# Altium PCB WIoT_AM01_V100.PcbDoc
Units mil, origin at the board's own origin, x right, y up, seen from the top; angles counter-clockwise.
Board outline 1422.35 x 1973.53 mil, 4 copper layers (Top Layer, Internal Plane 1, Internal Plane 2, Bottom Layer); 32 components, 39 nets, 189 pads, 130 vias.
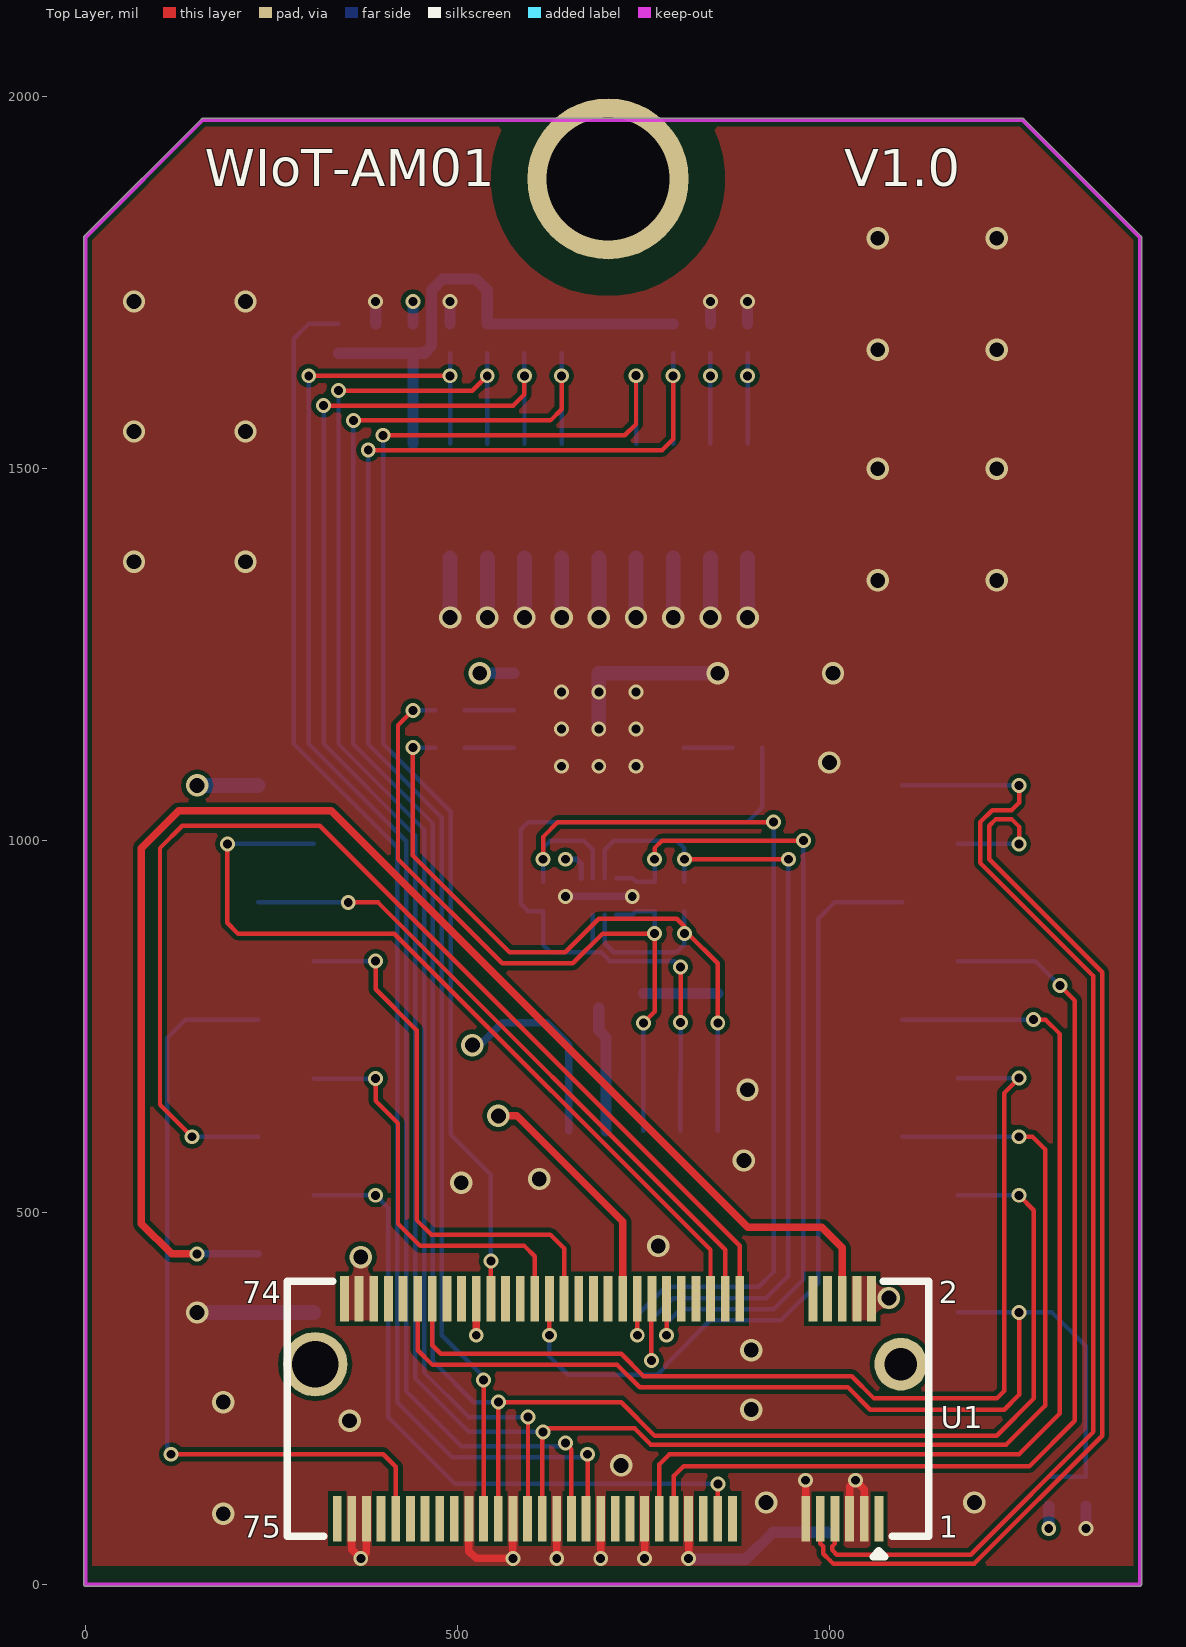
[diagram p0: Top Layer view]
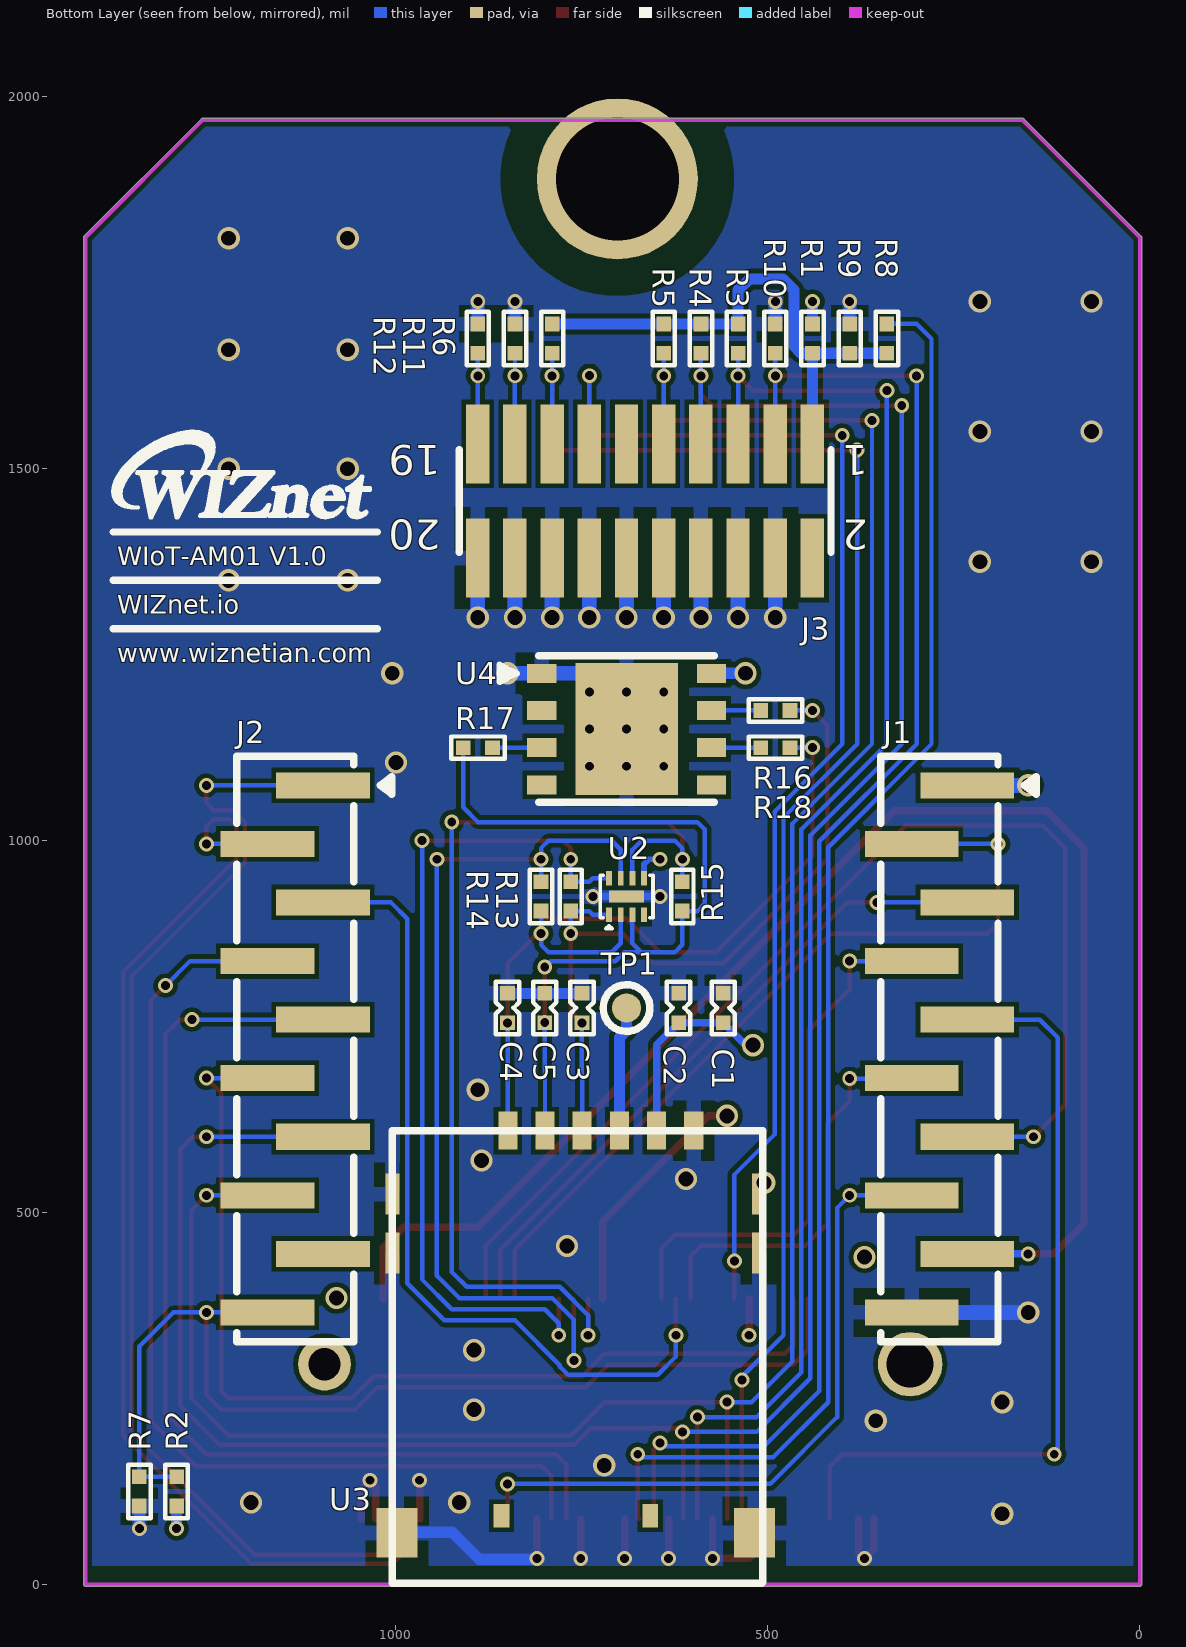
[diagram p1: Bottom Layer view, seen from below]
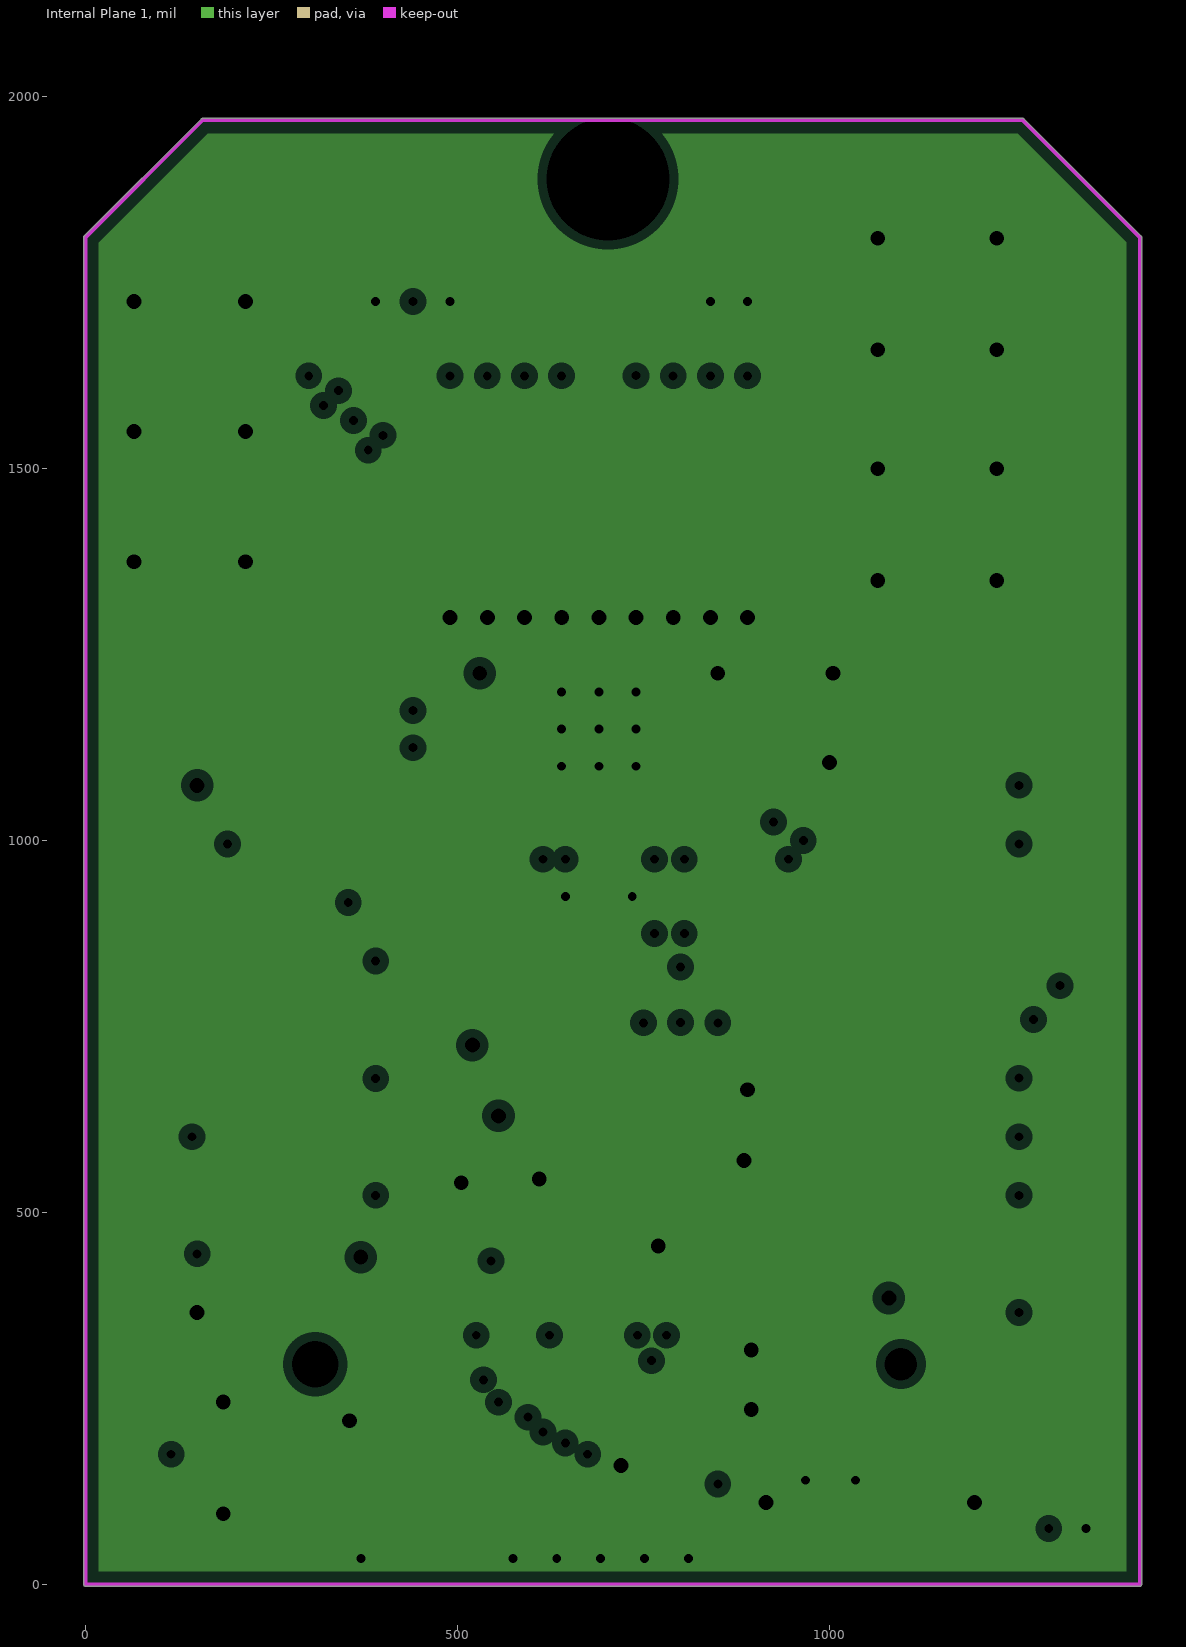
[diagram p2: Internal Plane 1, clearances drawn from the general rule]
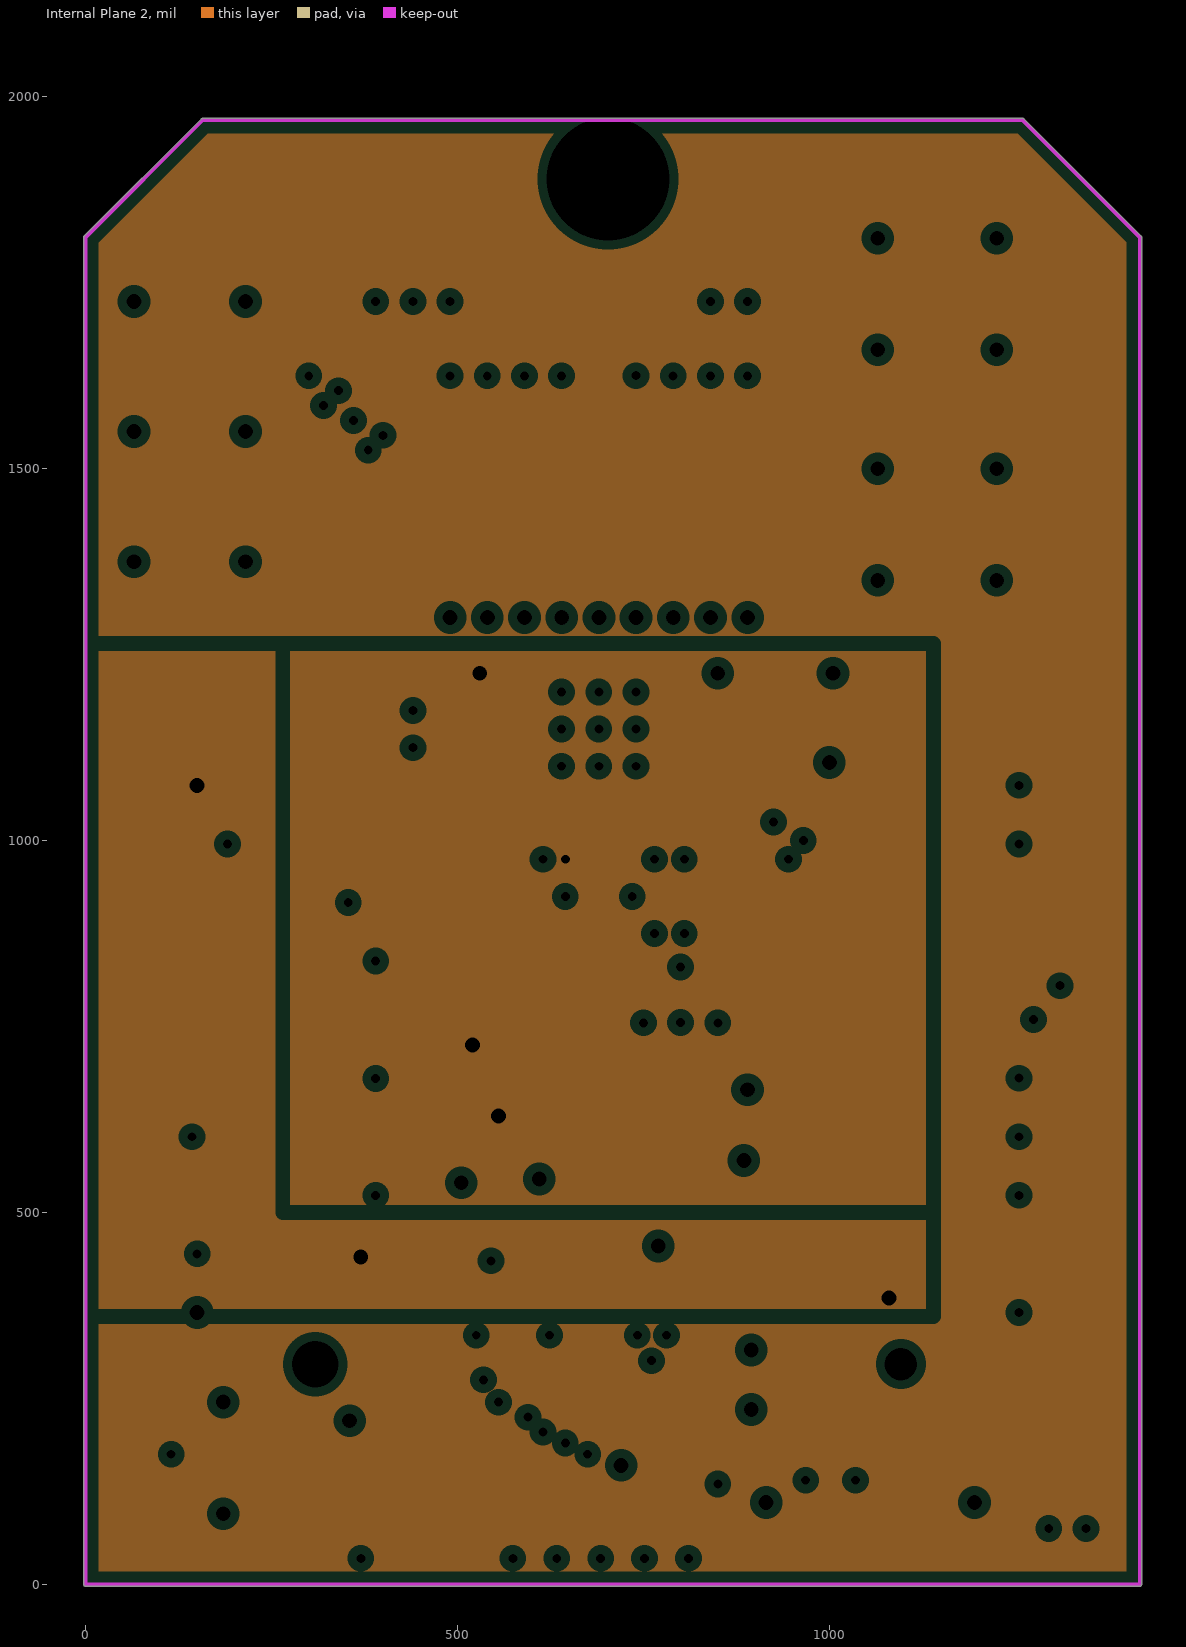
[diagram p3: Internal Plane 2, clearances drawn from the general rule]

## Layer stack, top to bottom
Top Solder: solder mask 0.4, Solder Resist, Dk 3.5
Top Layer: signal copper 1.4
Dielectric1: core 12.6, FR-4, Dk 4.8
Internal Plane 1: plane copper 1.4, net GND
Dielectric5: prepreg 12.6, FR-4, Dk 4.8
Internal Plane 2: plane copper 1.4, net (Multiple Nets)
Dielectric6: core 12.6, FR-4, Dk 4.8
Bottom Layer: signal copper 1.4
Bottom Solder: solder mask 0.4, Solder Resist, Dk 3.5

## Board outline
-2.51,0 -2.51,1811.02 cw(c0,1811.02) -1.78,1812.8 155.7,1970.28 cw(c157.48,1968.5) 157.48,1971.02 1259.84,1971.02 cw(c1259.84,1968.5) 1261.62,1970.28 1419.1,1812.8 cw(c1417.32,1811.02) 1419.84,1811.02 1419.84,0 cw(c1417.32,0) 1417.32,-2.51 0,-2.51 cw(c0,0)

## Design rules (kind name [scope] priority, off if disabled: settings)
Clearance [All] p1: gap=6
DiffPairsRouting [All] p1: maxlimit=6 minlimit=6 mostfreqgap=6 toplayer_minwidth=6 toplayer_maxwidth=6 toplayer_prefwidth=6 bottomlayer_minwidth=6 bottomlayer_maxwidth=6 bottomlayer_prefwidth=6 maxuncoupledlength=600
HoleSize [All] p1: absolutevalues=TRUE maxlimit=1000 minlimit=1 maxpercent=80.000 minpercent=20.000
PlaneClearance [All] p1: clearance=12
PlaneConnect [All] p1: planeconnectstyle=Direct reliefexpansion=20 reliefentries=4 reliefconductorwidth=10 reliefairgap=10
PolygonConnect PolygonConnect_2 [IsPad vs IsNamedPolygon('Bottom Layer-GND') Or  IsNamedPolygon('Bottom Layer-GND')] p1: connectstyle=Relief reliefconductorwidth=20 reliefentries=4 polygonreliefangle="90 Angle" airgapwidth=15
PolygonConnect PolygonConnect_1 [IsVia] p2: connectstyle=Direct reliefconductorwidth=10 reliefentries=4 polygonreliefangle="90 Angle" airgapwidth=10
PolygonConnect [All] p3: connectstyle=Direct reliefconductorwidth=10 reliefentries=4 polygonreliefangle="90 Angle" airgapwidth=10
RoutingVias [All] p1: holewidth=12 width=20 viastyle="Through Hole" minholewidth=12 minwidth=20 maxholewidth=20 maxwidth=30
SolderMaskExpansion [All] p1: expansion=0
Width [All] p1: maxlimit=100 minlimit=4 preferedwidth=6
26 further rules are at their usual default settings.

## Components (designator, comment, footprint, x,y, rotation, side; value= is the part's Value field where it differs from the comment)
C1 "1uF" CAP-0402 560,775 r270 bottom
C2 "33pF" CAP-0402 620,775 r270 bottom
C3 "33pF" CAP-0402 750,775 r270 bottom
C4 "33pF" CAP-0402 850,775 r270 bottom
C5 "33pF" CAP-0402 800,775 r270 bottom
J1 "2.00mm 1x10 Pin Header SMD" IDC(SMD)-1X10(2MM) 269.33,720 r180 bottom locked
J2 "2.00mm 1x10 Pin Header SMD" IDC(SMD)-1X10(2MM) 1135.47,720 r180 bottom locked
J3 "1.27mm 2x10 Pin Header SMD" IDC(SMD)-2X10(1.27MM) 665.12,1456.69 r0 bottom locked
R1 "DNI" RES-0402 440,1675 r270 bottom
R2 "10K" RES-0402 1295,125 r270 bottom
R3 "10K" RES-0402 540,1675 r90 bottom
R4 "10K" RES-0402 590,1675 r90 bottom
R5 "10K" RES-0402 640,1675 r90 bottom
R6 "10K" RES-0402 790,1675 r90 bottom
R7 "DNI" RES-0402 1345,125 r90 bottom
R8 "10K" RES-0402 340,1675 r90 bottom
R9 "DNI" RES-0402 390,1675 r270 bottom
R10 "47K" RES-0402 490,1675 r270 bottom
R11 "10K" RES-0402 840,1675 r270 bottom
R12 "10K" RES-0402 890,1675 r270 bottom
R13 "DNI" RES-0402 765,925 r270 bottom
R14 "DNI" RES-0402 805,925 r270 bottom
R15 "DNI" RES-0402 615,925 r270 bottom
R16 "0R" RES-0402 490,1175 r180 bottom
R17 "0R" RES-0402 890,1125 r180 bottom
R18 "0R" RES-0402 490,1125 r180 bottom
TP1 "TESTPOINT_SMD" TP(SMD)-1PI 690,775 r180 bottom
U1 "PCIe_M2" PCIE_M2 702.4,236.22 r0 top locked
U2 "TPD3F303DQDR" PWSON08(0.4/1.45X1.8) 690,925 r90 bottom
U3 "Micro SIM" 0786463001 1005,610 r270 bottom
U4 "e-SIM" SON08(1.27/6X5) 690,1150 r180 bottom locked
? "Comment" LOGO-WIZNET(SMALL) 1330.43,1434.57 r180 bottom

## Footprints (in the part's own frame and the unit in brackets; to place one, negate y for a bottom-side part, rotate by r counter-clockwise, add the part's x,y. Pads: shape width x height; smd on the part's side, far side on the other; paste and mask are expansions set on the pad)
0786463001 [mm]
  rect 1.3x0.65 smd: C1(0,9.025) C2(0,6.485) C3(0,3.945) C5(0,10.295) C6(0,7.755) C7(0,5.215)
  rect 1.4x0.48 smd: GND1(2.17,12.53) GND2(4.17,12.53) GND5(4.17,0) GND6(2.17,0)
  rect 1.7x1.4 smd: GND3(13.73,12.37) GND4(13.73,0.16)
  rect 0.8x0.54 smd: X1(13.15,8.81) X2(13.15,3.73)
  silkscreen extent 0,0 15.45,12.65
CAP-0402 [mm]
  rect 0.5x0.5 smd: 1(-0.5,0) 2(0.5,0)
  silkscreen extent -0.9,-0.4 0.9,0.4, body extent -0.48,-0.25 0.52,0.25, height 0.6
IDC(SMD)-1X10(2MM) [mm]
  rect 3.2x0.89 smd: 1(0.95,9) 2(-0.95,7) 3(0.95,5) 4(-0.95,3) 5(0.95,1) 6(-0.95,-1) 7(0.95,-3) 8(-0.95,-5) 9(0.95,-7) 10(-0.95,-9)
  silkscreen extent -2,-10 3.3,10, body extent -2.25,-9.98 2.25,9.97, height 6.5
IDC(SMD)-2X10(1.27MM) [mm]
  rect 0.8x2.7 smd: 1(-5.715,-1.95) 2(-5.715,1.95) 3(-4.445,-1.95) 4(-4.445,1.95) 5(-3.175,-1.95) 6(-3.175,1.95) 7(-1.905,-1.95) 8(-1.905,1.95) 9(-0.635,-1.95) 10(-0.635,1.95) 11(0.635,-1.95) 12(0.635,1.95) 13(1.905,-1.95) 14(1.905,1.95) 15(3.175,-1.95) 16(3.175,1.95) 17(4.445,-1.95) 18(4.445,1.95) 19(5.715,-1.95) 20(5.715,1.95)
  silkscreen extent -6.35,-1.75 6.35,1.75, body extent -6.35,-2.75 6.35,2.75, height 4.5
LOGO-WIZNET(SMALL) [mil]
  silkscreen extent -50,0 296,115
PCIE_M2 [mm]
  round 2.2 hole 1.6: 0(-10,1.52)
  round 5.5 hole 4.2: 0(0,42)
  round 1.8 hole 1.1: 0(10,1.52)
  rect 0.3x1.55 smd: 1(9.25,-3.755) 2(9,3.755) 3(8.75,-3.755) 4(8.5,3.755) 5(8.25,-3.755) 6(8,3.755) 7(7.75,-3.755) 8(7.5,3.755) 9(7.25,-3.755) 10(7,3.755) 11(6.75,-3.755) 20(4.5,3.755) 21(4.25,-3.755) 22(4,3.755) 23(3.75,-3.755) 24(3.5,3.755) 25(3.25,-3.755) 26(3,3.755) 27(2.75,-3.755) 28(2.5,3.755) 29(2.25,-3.755) 30(2,3.755) 31(1.75,-3.755) 32(1.5,3.755) 33(1.25,-3.755) 34(1,3.755) 35(0.75,-3.755) 36(0.5,3.755) 37(0.25,-3.755) 38(0,3.755) 39(-0.25,-3.755) 40(-0.5,3.755) 41(-0.75,-3.755) 42(-1,3.755) 43(-1.25,-3.755) 44(-1.5,3.755) 45(-1.75,-3.755) 46(-2,3.755) 47(-2.25,-3.755) 48(-2.5,3.755) 49(-2.75,-3.755) 50(-3,3.755) 51(-3.25,-3.755) 52(-3.5,3.755) 53(-3.75,-3.755) 54(-4,3.755) 55(-4.25,-3.755) 56(-4.5,3.755) 57(-4.75,-3.755) 58(-5,3.755) 59(-5.25,-3.755) 60(-5.5,3.755) 61(-5.75,-3.755) 62(-6,3.755) 63(-6.25,-3.755) 64(-6.5,3.755) 65(-6.75,-3.755) 66(-7,3.755) 67(-7.25,-3.755) 68(-7.5,3.755) 69(-7.75,-3.755) 70(-8,3.755) 71(-8.25,-3.755) 72(-8.5,3.755) 73(-8.75,-3.755) 74(-9,3.755) 75(-9.25,-3.755)
  silkscreen extent -10.95,-5.06 10.95,4.35
PWSON08(0.4/1.45X1.8) [mm]
  rect 0.5x0.2 smd: 1(-0.625,0.6) 2(-0.625,0.2) 3(-0.625,-0.2) 4(-0.625,-0.6) 5(0.625,-0.6) 6(0.625,-0.2) 7(0.625,0.2) 8(0.625,0.6)
  rect 0.4x1.2 smd: 9(0,0)
  silkscreen extent -1.1,-0.9 0.72,0.9, body extent -0.66,-0.85 0.66,0.85, height 0.8
RES-0402 [mm]
  rect 0.5x0.5 smd: 1(-0.5,0) 2(0.5,0)
  silkscreen extent -0.91,-0.38 0.91,0.38, body extent -0.5,-0.25 0.5,0.25, height 0.35
SON08(1.27/6X5) [mm]
  rect 1x0.65 smd: 1(-2.9,1.905) 2(-2.9,0.635) 3(-2.9,-0.635) 4(-2.9,-1.905) 5(2.9,-1.905) 6(2.9,-0.635) 7(2.9,0.635) 8(2.9,1.905)
  rect 3.5x4.5 smd: 9(0,0)
  silkscreen extent -4.33,-2.5 3,2.5, body extent -3,-2.5 3,2.5, height 1
TP(SMD)-1PI [mm]
  round 1 smd: 1(0,0)
  silkscreen extent -0.8,-0.8 0.8,0.8

## Part data
C1 C2 C3 C4 C5: library part CAP-0402, "Ceramic CAP 0402(1005)"
R1 R2 R3 R4 R5 R6 R7 R8 R9 R10 R11 R12 R13 R14 R15 R16 R17 R18: library part RES-0402, "RES-0402"
TP1: "TEST POINT"
U1: library part PCIe-M2
U2: "ESD Protection SIM"
U3: "Micro SIM SMT 1.45mm Push/Pull"

## Via types
v1: diameter 20, hole 12, Top Layer to Bottom Layer, tented both sides, 80 vias
v2: diameter 30, hole 20, Top Layer to Bottom Layer, tented both sides, 46 vias
v3: diameter 20, hole 12, Top Layer to Bottom Layer, 4 vias

## Nets (pads, with @x,y where several pads share a name; then routed paths per layer and width w, separated by ;. In a path a pad name is that pad's centre, name@x,y a point inside that pad or via, vN(x,y) a via of type N, cw(c..) or ccw(c..) an arc to the next point about the centre after c; other vN are vias at no path point)
1.8V_OUT: R1.1 R2.2 U1.56 | length 109.7
  Top Layer w10: v1(525.24,335) U1.56
  Bottom Layer w15: R1.1 v1(440,1725) ; v1(1295,75) R2.2
GND: C1.1 C2.1 C3.1 C4.1 C5.1 J1.10 J3.4 J3.6 J3.8 J3.10 J3.12 J3.14 J3.16 J3.18 J3.20 R7.1 R9.1 R10.1 R11.1 R12.1 U1.3 U1.5 U1.11 U1.27 U1.33 U1.39 U1.45 U1.51 U1.57 U1.71 U1.73 U2.9 U3.C5 U3.GND1 U3.GND2 U3.GND3 U3.GND4 U3.GND5 U3.GND6 U4.1 U4.9 | length 2309.6
  Top Layer w10: U1.73 357.91,47.09 v1(370,35) 377.6,42.6 U1.71 ; U1.57 515.39,44.61 525,35 v1(574.45,35) U1.51 ; v1(633.5,35) U1.45 ; v1(692.56,35) U1.39 ; v1(751.61,35) U1.33 ; v1(810.67,35) U1.27 ; U1.11 v1(968.15,140) ; U1.5 1027.2,132.2 v1(1035,140) 1046.89,128.11 U1.3
  Bottom Layer w10: v1(645,925) U2.9 v1(735,925)
  Bottom Layer w15: R9.1 v1(390,1725) ; R10.1 v1(490,1725) ; v1@573.31,33.86 v1(574.45,35) ; C3.1 C5.1 C4.1 ; v1(810.67,35) 811.81,33.86 888.11,33.86 924.25,70 998.15,70 U3.GND4 ; R11.1 v1(840,1725) ; R12.1 v1(890,1725) ; v1(1345,75) R7.1
  Bottom Layer w20: v2(150,365.67) J1.10 ; v2(490.12,1300) J3.4 ; v2(540.12,1300) J3.6 ; v2(590.12,1300) J3.8 ; v2(640.12,1300) J3.10 ; v1(690,1150) v1(690,1200) 690,1225 U4.1 v2(850,1225) ; v2(690.12,1300) J3.12 ; v2(740.12,1300) J3.14 ; v2(790.12,1300) J3.16 ; v2(840.12,1300) J3.18 ; v2(890.12,1300) J3.20
  other v1: 640,1100 690,1100 740,1100 640,1150 740,1150 640,1200 740,1200
  other v2: 185,95 915,110 1195,110 720,160 355,220 895,235 185,245 895,315 770,455 505,540 610,545 885,570 890,665 1000,1105 1005,1225 1065,1350 1225,1350 65,1375 215,1375 1065,1500 1225,1500 65,1550 215,1550 1065,1660 1225,1660 65,1725 215,1725 1065,1810 1225,1810
GPIO1: J1.8 U1.23 | length 915.4
  Top Layer w6: U1.23 v1(850.04,135)
  Bottom Layer w6: J1.8 v1(390,523.15) 407,506.15 407,225 497,135 v1(850.04,135)
JTAG_PS_HOLD: R8.2 U1.41 | length 1931.5
  Top Layer w6: U1.41 675,90.51 v1(675,175)
  Bottom Layer w6: R8.2 299.68,1694.68 280,1675 280,1130 419,991 419,245 493,171 671,171 v1(675,175)
JTAG_SRST: J3.15 R6.1 U1.55 | length 2124
  Top Layer w6: v1(380,1525) 775,1525 790,1540 v1(790,1625) ; v1(535,275) 535.08,274.92 U1.55
  Bottom Layer w6: v1(380,1525) 380,1130 479,1031 479,335 535,279 v1(535,275) ; R6.1 v1(790,1625) 790.12,1624.88 J3.15
JTAG_TCK: J2.8 J3.9 R5.1 U1.53 | length 3152.8
  Top Layer w6: v1(360,1565) 625,1565 640,1580 v1(640,1625) ; U1.53 554.76,244.76 v1(555,245) 720,245 765,200 1225,200 1275,250 1275,503.15 v1(1255,523.15)
  Bottom Layer w6: v1(360,1565) 360,1130 467,1023 467,300 522,245 v1(555,245) ; R5.1 v1(640,1625) 640.12,1624.88 J3.9 ; J2.8 v1(1255,523.15)
JTAG_TDI: J3.5 R3.1 U1.49 | length 1999.3
  Top Layer w6: v1(340,1605) 520,1605 v1(540,1625) ; U1.49 594.82,89.07 v1(594.82,224.82)
  Bottom Layer w6: v1(340,1605) 340,1130 455,1015 455,285 515,225 594.64,225 v1(594.82,224.82) ; R3.1 v1(540,1625) 540,1533.58 J3.5
JTAG_TDO: J3.13 U1.54 | length 1724
  Top Layer w6: v1(400,1545) 725,1545 740,1560 v1(740,1625.12) ; U1.54 v1(544.92,435)
  Bottom Layer w6: v1(400,1545) 400,1130 491,1039 491,605 544.92,551.08 v1(544.92,435) ; J3.13 v1@740.12,1625.12
JTAG_TMS: J2.7 J3.7 R4.1 U1.47 | length 3351.3
  Top Layer w6: v1(320,1585) 575,1585 590,1600 v1(590,1625) ; U1.47 613.82,201.62 622.2,210 738.03,210 760.03,188 1238,188 1290,240 1290,585 1273.11,601.89 v1(1255,601.89)
  Bottom Layer w6: v1(320,1585) 320,1130 443,1007 443,277 515,205 v1(615,205) ; R4.1 v1(590,1625) 590.12,1624.88 J3.7 ; J2.7 v1(1255,601.89)
JTAG_TRST: J3.3 R10.2 U1.43 | length 2082.5
  Top Layer w6: v1(300,1625) v1(490,1625) ; v1(645,190) 653.19,181.81 U1.43
  Bottom Layer w6: v1(300,1625) 300,1130 431,999 431,260 505,186 641,186 v1(645,190) ; R10.2 v1(490,1625) 490,1533.58 J3.3
NetJ3_1: J3.1 R1.2 R3.2 R4.2 R5.2 R6.2 R8.1 R9.2 | length 708.7
  Bottom Layer w15: R8.1 R9.2 R1.2 ; J3.1 440.12,1655.2 R1.2 ; R6.2 R5.2 R4.2 R3.2 540,1740 525,1755 480,1755 465,1740 465,1665 455.32,1655.32 R1.2
NetJ3_17: J3.17 R11.2 | length 121.9
  Bottom Layer w6: R11.2 v1(840,1625) 840.12,1624.88 J3.17
NetJ3_19: J3.19 R12.2 | length 121.9
  Bottom Layer w6: R12.2 v1(890,1625) 890.12,1624.88 J3.19
NetR13_1: R13.1 U1.30 U2.8 | length 1166.3
  Top Layer w6: v1(765,975) 765,990 775,1000 v1(965,1000) ; v1(781.14,335) U1.30
  Bottom Layer w6: U2.8 735.39,949.61 740.32,944.68 R13.1 v1(765,975) ; v1(781.14,335) 781.14,351.14 800,370 925,370 965,410 v1(965,1000)
NetR14_1: R14.1 U1.32 U2.7 | length 1247.2
  Top Layer w6: v1(760.77,300.77) 760.77,383.37 U1.32 ; v1(805,975) v1(945,975)
  Bottom Layer w6: U2.7 697.87,987.87 710,1000 795,1000 805,990 v1(805,975) R14.1 ; v1(760.77,300.77) 760.77,355.77 790,385 915,385 945,415 v1(945,975)
NetR15_1: R15.1 U1.34 U2.6 | length 1396.3
  Top Layer w6: v1(615,975) 615,1005 635,1025 v1(925,1025) ; v1(741.77,335) U1.34
  Bottom Layer w6: R15.1 v1(615,975) 615,990 625,1000 670,1000 682.13,987.87 U2.6 ; v1(741.77,335) 741.77,361.77 780,400 905,400 925,420 v1(925,1025)
NetR16_1: R16.1 U4.7 | length 66.1
  Bottom Layer w6: R16.1 U4.7
NetR17_2: R17.2 U4.3 | length 66.1
  Bottom Layer w6: U4.3 R17.2
NetR18_1: R18.1 U4.6 | length 66.1
  Bottom Layer w6: R18.1 U4.6
NetTP1_1: TP1.1 U3.C6 | length 169
  Bottom Layer w15: TP1.1 690,745 699.68,735.32 U3.C6
POWER: J1.9 U1.6 | length 1953.7
  Top Layer w10: v1(150,444.41) 115.59,444.41 75,485 75,990 125,1040 330,1040 890,480 990,480 1017.36,452.64 U1.6
  Bottom Layer w10: v1(150,444.41) J1.9
READY: J1.4 U1.44 | length 736
  Top Layer w6: v1(390,838.11) 390,800 445,745 445,490 465,470 625,470 643.35,451.65 U1.44
  Bottom Layer w6: J1.4 v1(390,838.11)
RESET: J1.5 U1.67 | length 1072.7
  Top Layer w6: v1(115,175) 400,175 416.97,158.03 U1.67
  Bottom Layer w6: v1(115,175) 110,180 110,735 134.37,759.37 J1.5
SIMCLK: C4.2 R14.2 R18.2 U2.2 U3.C3 | length 1113.5
  Top Layer w6: v1(440,1125) 440,980 570,850 645,850 690,895 795,895 805,885 v1(805,875) 810,875 850,835 v1(850,755)
  Bottom Layer w6: v1(440,1125) R18.2 ; U2.2 697.87,862.13 710,850 795,850 805,860 v1(805,875) R14.2 ; U3.C3 849.69,685 850,685.31 v1(850,755)
SIMIO: C5.2 R15.2 R17.1 U2.3 U3.C7 | length 1069.6
  Top Layer w6: v1(800,755.32) v1(800,830)
  Bottom Layer w6: U2.3 682.13,862.13 670,850 ; U3.C7 799.68,685 800,685.31 v1(800,755.32) ; v1(800,830) 792,838 705.03,838 693.03,850 670,850 ; R17.1 909.68,1044.68 890,1025 595,1025 585,1015 585,915 594.68,905.32 R15.2 615,860 625,850 670,850
SIMRST: C3.2 R13.2 R16.2 U2.1 U3.C2 | length 1013.2
  Top Layer w6: v1(440,1175) 420,1155 420,975 560,835 655,835 695,875 v1(765,875) 765,770 v1(750,755)
  Bottom Layer w6: v1(440,1175) R16.2 ; U2.1 735.39,900.39 740.32,905.32 R13.2 v1(765,875) ; U3.C2 749.68,685 750,685.31 v1(750,755)
SLEEP: J2.10 R2.1 R7.2 U1.64 | length 1446
  Top Layer w6: U1.64 446.5,315 466.5,295 715,295 745,265 1025,265 1055,235 1235,235 1255,255 v1(1255,365.67)
  Bottom Layer w6: J2.10 v1(1255,365.67) 1299.33,365.67 1345,320 R7.2 R2.1
STATE: J2.3 U1.46 | length 1113.5
  Top Layer w6: v1(623.66,335) U1.46
  Bottom Layer w6: v1(623.66,335) 623.66,306.34 648.23,281.77 768.64,281.77 779.77,292.9 779.77,294.77 840,355 935,355 985,405 985,895 1006.85,916.85 J2.3
UART1_CTS_MCU: J1.6 U1.48 | length 550.1
  Top Layer w6: v3(390,680) 390,650 420,620 420,485 450,455 590,455 603.98,441.02 U1.48
  Bottom Layer w6: J1.6 307.36,680 v3(390,680)
UART1_RTS_MCU: J1.7 U1.20 | length 1592
  Top Layer w6: v3(143.11,601.89) 100,645 100,990 130,1020 315,1020 879.57,455.43 U1.20
  Bottom Layer w6: v3(143.11,601.89) J1.7
UART1_RXD_MCU: J1.3 U1.22 | length 887.3
  Top Layer w6: v3(353.15,916.85) 393.15,916.85 859.88,450.12 U1.22
  Bottom Layer w6: J1.3 v3(353.15,916.85)
UART1_TXD_MCU: J1.2 U1.24 | length 1119.8
  Top Layer w6: v3(190.59,995.59) 190.59,889.41 205,875 415,875 840.2,449.8 U1.24
  Bottom Layer w6: v3(190.59,995.59) J1.2
UART2_RXD_MCU: J2.5 U1.31 | length 1370
  Top Layer w6: U1.31 771.3,161.3 785,175 1255,175 1310,230 1310,740 1290.63,759.37 v1(1274.37,759.37)
  Bottom Layer w6: J2.5 v1(1274.37,759.37)
UART2_TXD_MCU: J2.4 U1.29 | length 1371.4
  Top Layer w6: U1.29 790.98,145.98 804,159 1269,159 1330,220 1330,785 v1(1310,805)
  Bottom Layer w6: J2.4 1276.89,838.11 v1(1310,805)
USB_D+: J2.1 U1.7 | length 1591.9
  Top Layer w6: U1.7 1007.52,54.87 1003.68,51.03 1003.68,46.32 1010,40 1190,40 1355,205 1355,818.03 1203,970.03 1203,1024.97 1218.99,1040.96 1245,1040.96 1255,1050.96 v1(1255,1074.33)
  Bottom Layer w6: J2.1 v1(1255,1074.33)
USB_D-: J2.2 U1.9 | length 1537
  Top Layer w6: U1.9 987.83,54.87 991.68,51.03 991.68,41.35 1001.51,31.51 1005.03,28 1194.97,28 1367,200.03 1367,823 1215,975 1215,1020 1223.96,1028.96 1245,1028.96 1255,1018.96 v1(1255,995.59)
  Bottom Layer w6: J2.2 v1(1255,995.59)
USIM_PWR: C1.2 C2.2 U1.36 U2.5 U3.C1 U4.8 | length 688.8
  Top Layer w10: v2(555,630) 580,630 722.09,487.91 U1.36
  Bottom Layer w8: v1(645,975) 660,975 666.38,968.62 U2.5
  Bottom Layer w10: v2(520,725) 529.68,725 C1.2 C2.2 649.68,725.63 U3.C1
  Bottom Layer w15: v2(530,1225) U4.8
WAKE_UP: J2.6 U1.62 | length 1376.2
  Top Layer w6: U1.62 466.18,321.44 477.62,310 720,310 750,280 1030,280 1060,250 1225,250 1235,260 1235,660.63 v1(1255,680.63)
  Bottom Layer w6: J2.6 v1(1255,680.63)
XBEE_VIN: J1.1 U1.2 U1.4 U1.70 U1.72 U1.74 | length 81.9
  Bottom Layer w20: v2(150,1074.33) J1.1
  other v2: 1080,385 370,440
pads on no net: J2.9 J3.2 J3.11 U1.0 U1.1 U1.8 U1.10 U1.21 U1.25 U1.26 U1.28 U1.35 U1.37 U1.38 U1.40 U1.42 U1.50 U1.52 U1.58 U1.59 U1.60 U1.61 U1.63 U1.65 U1.66 U1.68 U1.69 U1.75 U2.4 U3.X1 U3.X2 U4.2 U4.4 U4.5

## Polygon pours and split planes (outlines as drawn)
XBEE_VIN on Top Layer "Top Layer-net" (solid, remove dead copper, pour order 14): 1100,395 1100,365 1090,355 1030,355 1030,415 1090,415 1100,405
XBEE_VIN on Top Layer "Top Layer-net" (solid, remove dead copper, pour order 10): 390,435 390,355 345,355 345,450 355,460 380,460 390,450
GND on Top Layer "Top Layer-GND" (solid, remove dead copper, pour order 6): 230,2140 125,2140 35,2050 -60,1955 -60,1840 -60,35 -50,25 -30,25 1455,25 1465,35 1465,45 1465,1955 1300,2120 1280,2140 1225,2140
GND on Bottom Layer "Bottom Layer-GND" (solid, remove dead copper, pour order 8): 235,2140 130,2140 40,2050 -55,1955 -55,1840 -55,35 -45,25 -25,25 1460,25 1470,35 1470,45 1470,1955 1305,2120 1285,2140 1230,2140
GND on Internal Plane 1 (split plane): 1399.74,1803.74 1399.74,17.58 17.58,17.58 17.58,1803.74 164.76,1950.92 1252.56,1950.92
USIM_PWR on Internal Plane 2 (split plane): 1129.91,510.09 275.09,510.09 275.09,1254.91 1129.91,1254.91
XBEE_VIN on Internal Plane 2 (split plane): 1399.74,1803.74 1399.74,17.58 17.58,17.58 17.58,349.91 1140,349.91 1142.61,350.26 1145.04,351.26 1147.13,352.87 1148.74,354.96 1149.74,357.39 1150.09,360 1150.09,500 1150.09,1265 1149.74,1267.61 1148.74,1270.04 1147.13,1272.13 1145.04,1273.74 1142.61,1274.74 1140,1275.09 17.58,1275.09 17.58,1279 210.67,1279 210.67,1330.99 17.58,1330.99 17.58,1803.74 164.76,1950.92 1252.56,1950.92
XBEE_VIN on Internal Plane 2 (split plane): 254.91,1125 254.91,500 255.26,497.39 256.26,494.96 257.87,492.87 259.96,491.26 262.39,490.26 265,489.91 1129.91,489.91 1129.91,370.09 17.58,370.09 17.58,1199 201.25,1199 201.25,1250.99 17.58,1250.99 17.58,1254.91 254.91,1254.91

## Keep-outs
Keep-Out Layer:
  lines w5: 0,0 1417.32,0 1417.32,1811.02 1259.84,1968.5 157.48,1968.5 0,1811.02 0,0
  text ".Layer_Name" at 280,2135 h60

## Other copper
Top Layer:
  pour cut-out: 544.92,1889.76 ccw(c702.4,1889.76) 702.4,1732.28 ccw(c702.4,1889.76) 859.88,1889.76 ccw(c702.4,1889.76) 702.4,2047.24 ccw(c702.4,1889.76)
  text ".Layer_Name" at 280,2135 h60
Bottom Layer:
  pour cut-out: 544.92,1889.76 ccw(c702.4,1889.76) 702.4,1732.28 ccw(c702.4,1889.76) 859.88,1889.76 ccw(c702.4,1889.76) 702.4,2047.24 ccw(c702.4,1889.76)
  text ".Layer_Name" at 280,2135 h60
Internal Plane 1 (plane layer: these items are gaps in the copper):
  text "GND" at 280,2136.26 h60
Internal Plane 2 (plane layer: these items are gaps in the copper):
  lines w20: 0,360 1140,360 1140,500 ; 0,1265 265,1265 ; 265,1125 265,1265 ; 265,1265 1140,1265 1140,500 ; 265,1265 265,500 1140,500
  text "POWER" at 280,2136.26 h60
  text "1.8V_OUT" at 15,1295 h30
  text "XBEE_VIN" at 15,1215 h30
  text "USIM_PWR" at 285,1215 h30

## Silkscreen, mask and mechanical layers (free items; w line width, h text height)
Top Overlay:
  text ".Layer_Name" at 280,2136.26 h60
  text "WIoT-AM01" at 160,1880 h50
  text "V1.0" at 1020,1880 h50
Bottom Overlay:
  lines w9.84: 1025,1285 1380,1285 ; 1025,1350 1380,1350 ; 1025,1415 1380,1415
  text ".Layer_Name" at 280,2135 h60
  text "WIoT-AM01 V1.0" at 1375,1370 h25
  text "WIZnet.io" at 1375,1305 h25
  text "www.wiznetian.com" at 1375,1240 h25
Top Paste:
  text ".Layer_Name" at 280,2135 h60
Bottom Paste:
  text ".Layer_Name" at 280,2135 h60
Top Solder:
  text ".Layer_Name" at 280,2135 h60
Bottom Solder:
  text ".Layer_Name" at 280,2135 h60
Drill Guide:
  text ".Layer_Name" at 280,2135 h60
Mechanical 2:
  lines w5: 1718,635 2748,635 ; 1718,745 2748,745 ; 0,0 1417.32,0 1417.32,1811.02 1259.84,1968.5 157.48,1968.5 0,1811.02 0,0 ; 1665,188 ccw(c1693,188) 1693,160 2763,160 ccw(c2763,188) 2791,188 2791,945 ccw(c2763,945) 2763,973 1693,973 ccw(c1693,945) 1665,945 1665,188
  text "BOARD NAME : AMM592_INTERFACE" at -90,2575 h60
  text "VERSION : V100" at -90,2465 h60
  text "SIZE : 36mX50mX1.6T" at -90,2355 h60
  text "GERBER DATE : 2019.02.18" at -90,2245 h60
  text "LAYER :" at -90,2135 h60
  text "Layer Stack Up Detail for:" at 1723,890 h40
  text "AMM592_INTERFACE.PcbDoc" at 1718,795 h50
  text "Layer Name : 4L  1.6T" at 1723,670 h40
  text "Top Layer" at 1718,525 h60
  text "GND" at 1718,415 h60
  text "POWER" at 1718,310 h60
  text "Bottom Layer" at 1718,210 h60
  text "KS Technology artwork" at 1665,0 h200
Drill Drawing:
  text ".Layer_Name" at 280,2135 h60
  text ".Legend" at 1745,1080 h40

## Dimensions
0,0 to 1417.32,0 on Mechanical 2
0,0 to 157.48,1968.5 on Mechanical 2

## Text inside footprints (layer, text, board x,y; h text height)
J3: Bottom Overlay "1" at 365.12,1531.69 h40 r180; Bottom Overlay "2" at 365.12,1431.69 h40 r180; Bottom Overlay "20" at 940.12,1431.69 h40 r180; Bottom Overlay "19" at 940.12,1531.69 h40 r180
U1: Top Overlay "1" at 1147.28,62.99 h30; Top Overlay "2" at 1147.28,377.95 h30; Top Overlay "74" at 210.28,377.95 h30; Top Overlay "75" at 210.28,62.99 h30